# EAGLE board ME433_PCB (EAGLE 8.1.0)

Size 160 x 100 mm. Coordinates in mm from the lower left corner, seen from the top.
Outline: 0,0 160,0 160,100 0,100 0,0
Copper layers (1*16): Top 0.035mm / dielectric 1.5mm / Bottom 0.035mm
Design rules "default": minimum track width 10mil, minimum drill 24mil, track to track 8mil, track to pad 8mil, pad to pad 8mil, via to via 8mil, smd to smd 8mil, copper to edge 40mil, drill to drill 8mil, minimum pad ring 10mil, minimum via ring 8mil, stop-mask expansion 4mil, vias tented up to drill 0mil, thermal gap 10mil

## Footprints (pad centres in the part's own frame; a part is rotated, then mirrored left to right if it is on the bottom)
C025-025X050 = drill 0.813 octagon: 1 -1.27,0; 2 1.27,0
B45181B = drill 0.813: + -2.54,0 | drill 0.813 octagon: - 2.54,0
USB-MB-H = drill 0.8: D+ 5.1,0; D- 3.9,0.8; GND 5.1,-1.6; ID 3.9,-0.8; VBUS 5.1,1.6 | drill 1.9: P$6 0,-3.65; P$7 0,3.65
1X08 = drill 1.016 pad 1.88: 1 0,0; 2 2.54,0; 3 5.08,0; 4 7.62,0; 5 10.16,0; 6 12.7,0; 7 15.24,0; 8 17.78,0
LED3MM = drill 0.813 octagon: A -1.27,0; K 1.27,0
0204/7 = drill 0.813 octagon: 1 -3.81,0; 2 3.81,0
PB = drill 1.016 pad 1.88: 1 -2.54,0; 2 2.54,0
DIL28-3 = drill 0.813 long: 1 -16.51,-3.81; 2 -13.97,-3.81; 3 -11.43,-3.81; 4 -8.89,-3.81; 5 -6.35,-3.81; 6 -3.81,-3.81; 7 -1.27,-3.81; 8 1.27,-3.81; 9 3.81,-3.81; 10 6.35,-3.81; 11 8.89,-3.81; 12 11.43,-3.81; 13 13.97,-3.81; 14 16.51,-3.81; 15 16.51,3.81; 16 13.97,3.81; 17 11.43,3.81; 18 8.89,3.81; 19 6.35,3.81; 20 3.81,3.81; 21 1.27,3.81; 22 -1.27,3.81; 23 -3.81,3.81; 24 -6.35,3.81; 25 -8.89,3.81; 26 -11.43,3.81; 27 -13.97,3.81; 28 -16.51,3.81
OSC = drill 1.016 pad 1.88: 1 -2.54,0; 2 0,0; 3 2.54,0
SLIDE = drill 0.8: 1 -2,0; 2 0,0; 3 2,0 | drill 1: P$1 -4,0; P$2 4,0
1X05 = drill 1.016 pad 1.88: 1 0,0; 2 2.54,0; 3 5.08,0; 4 7.62,0; 5 10.16,0
TO92 = drill 0.813 octagon: 1 -1.27,0; 2 0,1.905; 3 1.27,0
1X03 = drill 1.016 pad 1.88: 1 0,0; 2 2.54,0; 3 5.08,0

## Placement (x,y rotation side)
C2  0.1uF  [C025-025X050]  -33.02,26.67 0 top  (outside the outline)
C3  0.1uF  [C025-025X050]  -39.37,26.67 0 top  (outside the outline)
C4  0.1uF  [C025-025X050]  -45.72,26.67 0 top  (outside the outline)
C5  0.1uF  [C025-025X050]  -52.07,26.67 0 top  (outside the outline)
C6  0.1uF  [C025-025X050]  -16.51,34.29 0 top  (outside the outline)
C7  10uF  [B45181B]  -34.29,15.24 0 top  (outside the outline)
C9  10uF  [B45181B]  -46.99,15.24 0 top  (outside the outline)
J1  USB-MB-H  [USB-MB-H]  -21.59,17.78 0 top  (outside the outline)
J2  [1X08]  -41.91,49.53 0 top  (outside the outline)
J3  [1X08]  -31.75,53.34 0 top  (outside the outline)
LED2  RED  [LED3MM]  -20.32,45.72 0 top  (outside the outline)
LED3  GREEN  [LED3MM]  -54.61,40.64 0 top  (outside the outline)
R1  10k  [0204/7]  -27.94,44.45 0 top  (outside the outline)
R2  10k  [0204/7]  -38.1,44.45 0 top  (outside the outline)
R3  330  [0204/7]  -48.26,44.45 0 top  (outside the outline)
R4  330  [0204/7]  -17.78,49.53 0 top  (outside the outline)
RESET  PB  [PB]  -27.94,33.02 0 top  (outside the outline)
U$1  PIC32  [DIL28-3]  -31.75,6.35 0 top  (outside the outline)
U$2  OSC  [OSC]  -17.78,40.64 0 top  (outside the outline)
U$3  SLIDE  [SLIDE]  -24.13,25.4 0 top  (outside the outline)
U$4  PICKIT  [1X05]  -54.61,33.02 0 top  (outside the outline)
U$5  MCP1702  [TO92]  -43.18,39.37 0 top  (outside the outline)
U$6  BUTTON  [1X03]  -29.21,40.64 0 top  (outside the outline)
USER  PB  [PB]  -39.37,33.02 0 top  (outside the outline)

## Library data of the parts
C2-C7 C9 J1 LED2 LED3 R1-R4 RESET U$1-U$6 USER = ME433
J2 J3 = ME433; PROD_ID: CONN-08438

## Nets
+3V3: C2.2 C4.2 C5.2 C6.2 C9.+ J2.2 LED2.A R1.2 R2.2 U$1.13 U$1.23 U$1.28 U$4.2 U$5.3
+5V: C3.2 J3.2 U$1.15 U$3.3 U$5.2
A0: J2.8 U$1.2
A1: J2.7 U$1.3
A4/LED: J2.3 LED3.A U$1.12
B2: J2.6 U$1.6
B3: J2.5 U$1.7
B4/USER: J2.4 U$1.11 USER.1
B7: J3.3 U$1.16
B8: J3.4 U$1.17
B9: J3.5 U$1.18
B13: J3.6 U$1.24
B14: J3.7 U$1.25
B15: J3.8 U$1.26
D+/B10: J1.D+ U$1.21
D-/B11: J1.D- U$1.22
GND: C2.1 C3.1 C4.1 C5.1 C6.1 C7.- C9.- J1.GND J2.1 J3.1 R1.1 R2.1 R3.1 R4.1 RESET.2 U$1.8 U$1.19 U$1.27 U$2.2 U$4.3 U$5.1 USER.2
ID/B5: J1.ID U$1.14
MCLR: RESET.1 U$1.1 U$4.1
N$2: LED2.K R3.2
N$3: U$1.9 U$2.1
N$4: U$1.10 U$2.3
N$6: J1.VBUS U$3.2
N$7: LED3.K R4.2
N$10: C7.+ U$1.20
PGEC: U$1.5 U$4.5
PGED: U$1.4 U$4.4

## Tracks (layer width: path | path; a pad name or v marks a point on that pad's centre or on a via)
+3V3  (13 unrouted)
+5V  (4 unrouted)
A0  (1 unrouted)
A1  (1 unrouted)
A4/LED  (2 unrouted)
B2  (1 unrouted)
B3  (1 unrouted)
B4/USER  (2 unrouted)
B7  (1 unrouted)
B8  (1 unrouted)
B9  (1 unrouted)
B13  (1 unrouted)
B14  (1 unrouted)
B15  (1 unrouted)
D+/B10  (1 unrouted)
D-/B11  (1 unrouted)
GND  (21 unrouted)
ID/B5  (1 unrouted)
MCLR  (2 unrouted)
N$2  (1 unrouted)
N$3  (1 unrouted)
N$4  (1 unrouted)
N$6  (1 unrouted)
N$7  (1 unrouted)
N$10  (1 unrouted)
PGEC  (1 unrouted)
PGED  (1 unrouted)